# Altium PCB LoRaSnow.PcbDoc
Units mm, origin at the board's own origin, x right, y up, seen from the top; angles counter-clockwise.
Board outline 53.4 x 53.7 mm, 2 copper layers (Top Layer, Bottom Layer), stack 1.57 mm thick; 15 components, 17 nets, 85 pads, 26 vias.
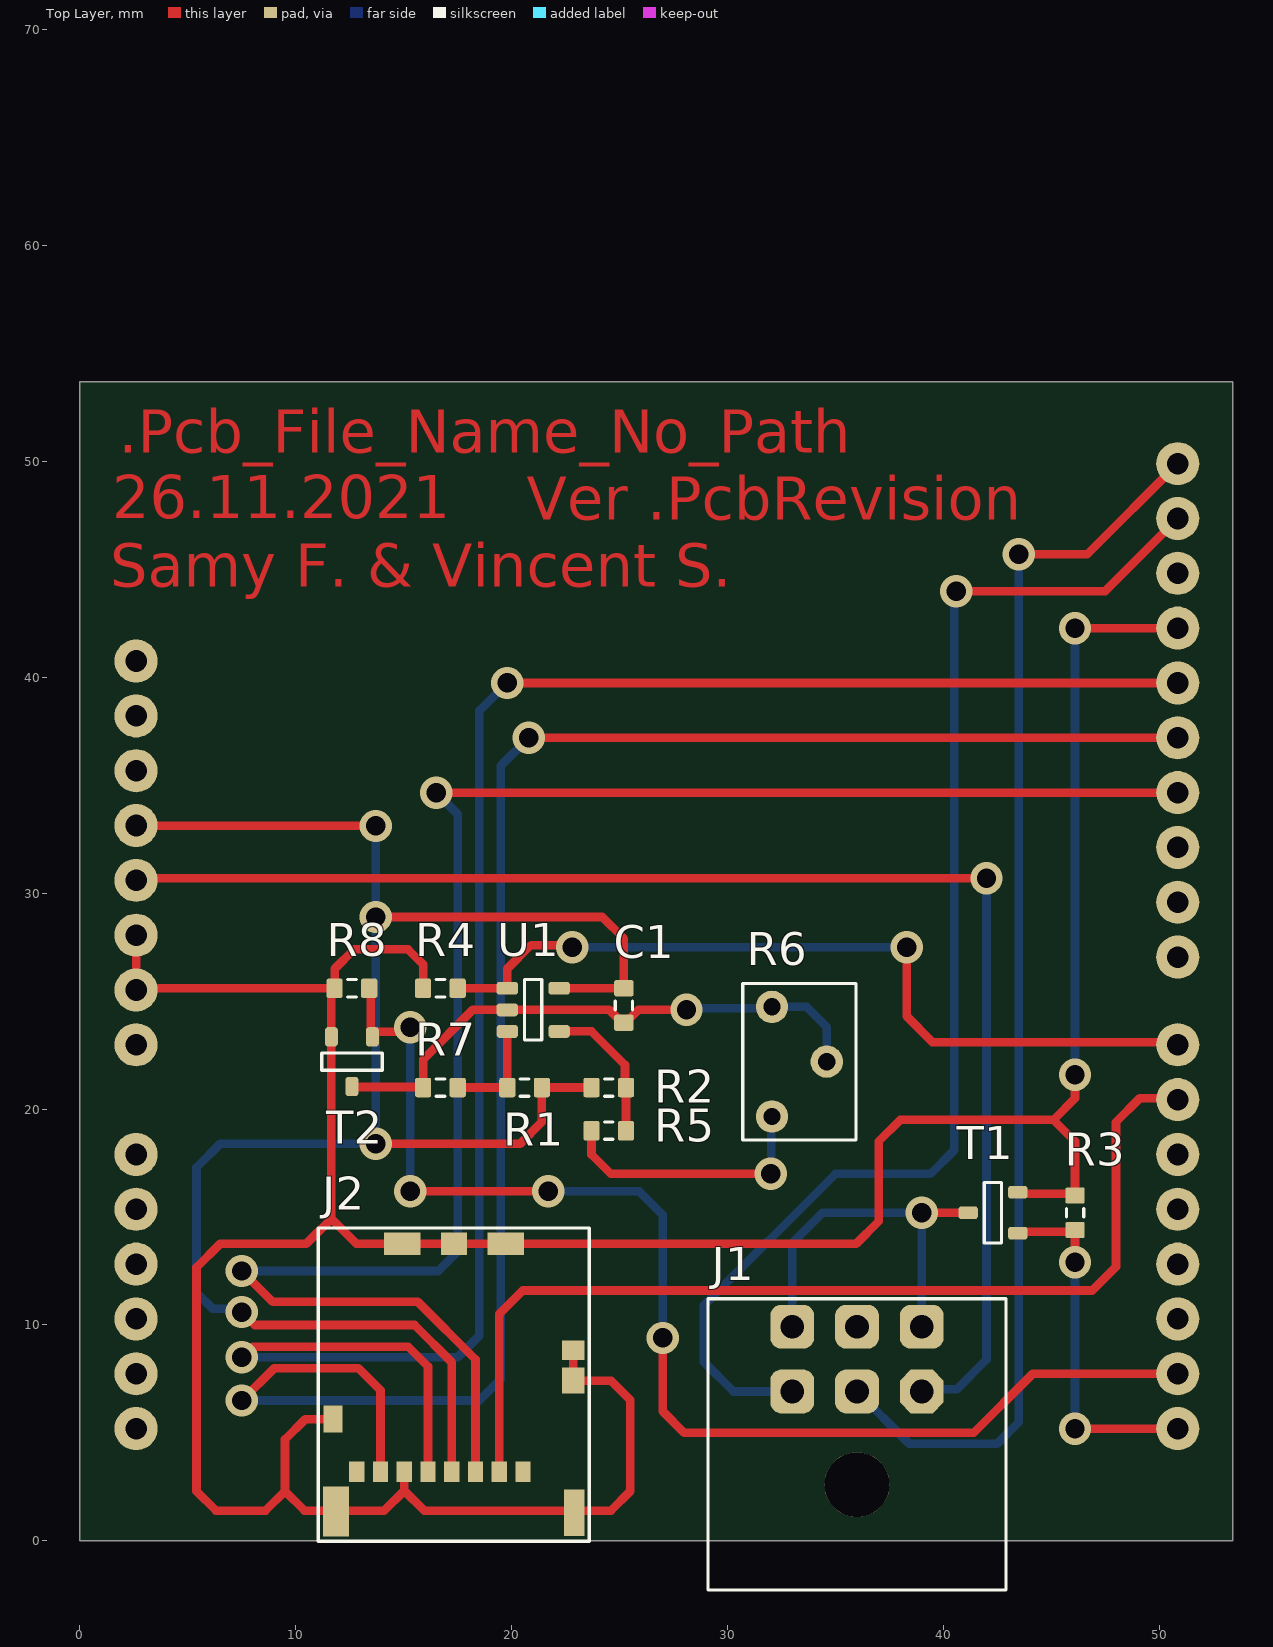
[diagram p0: Top Layer view]
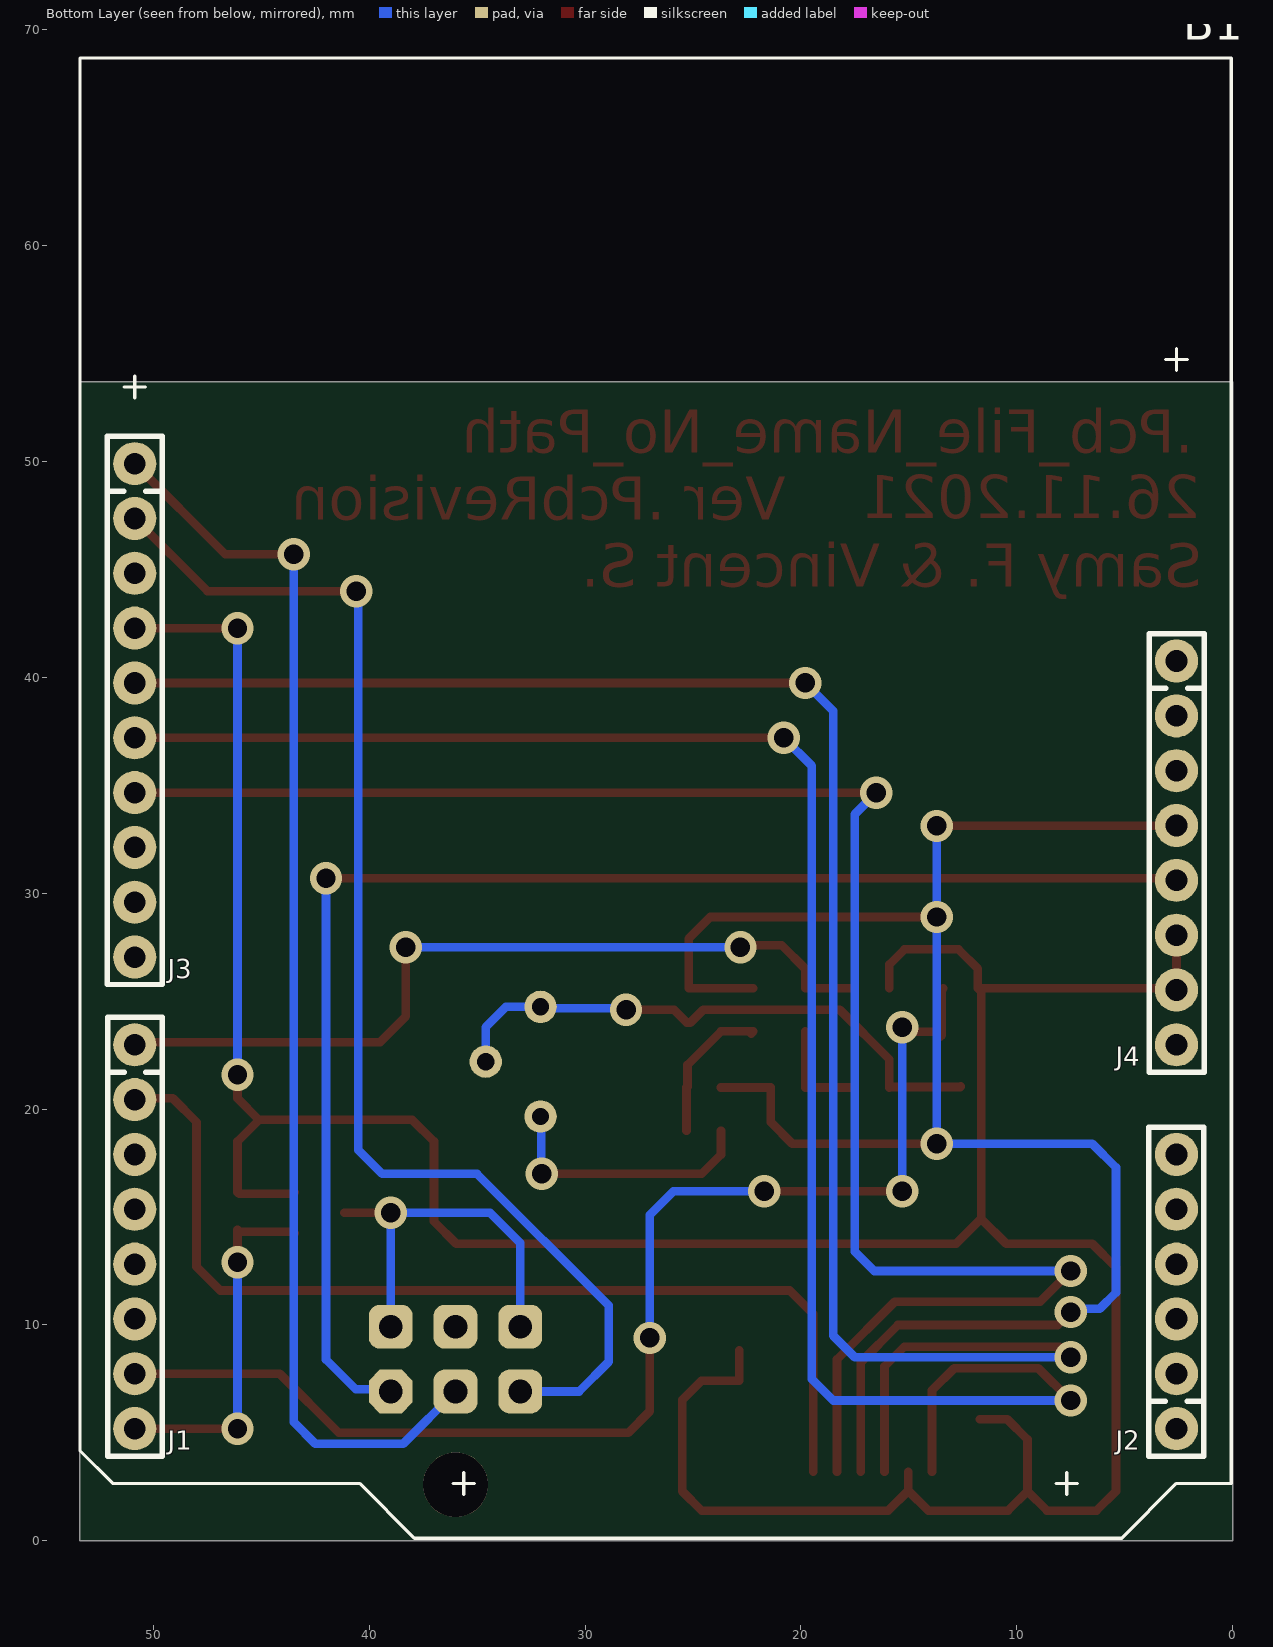
[diagram p1: Bottom Layer view, seen from below]
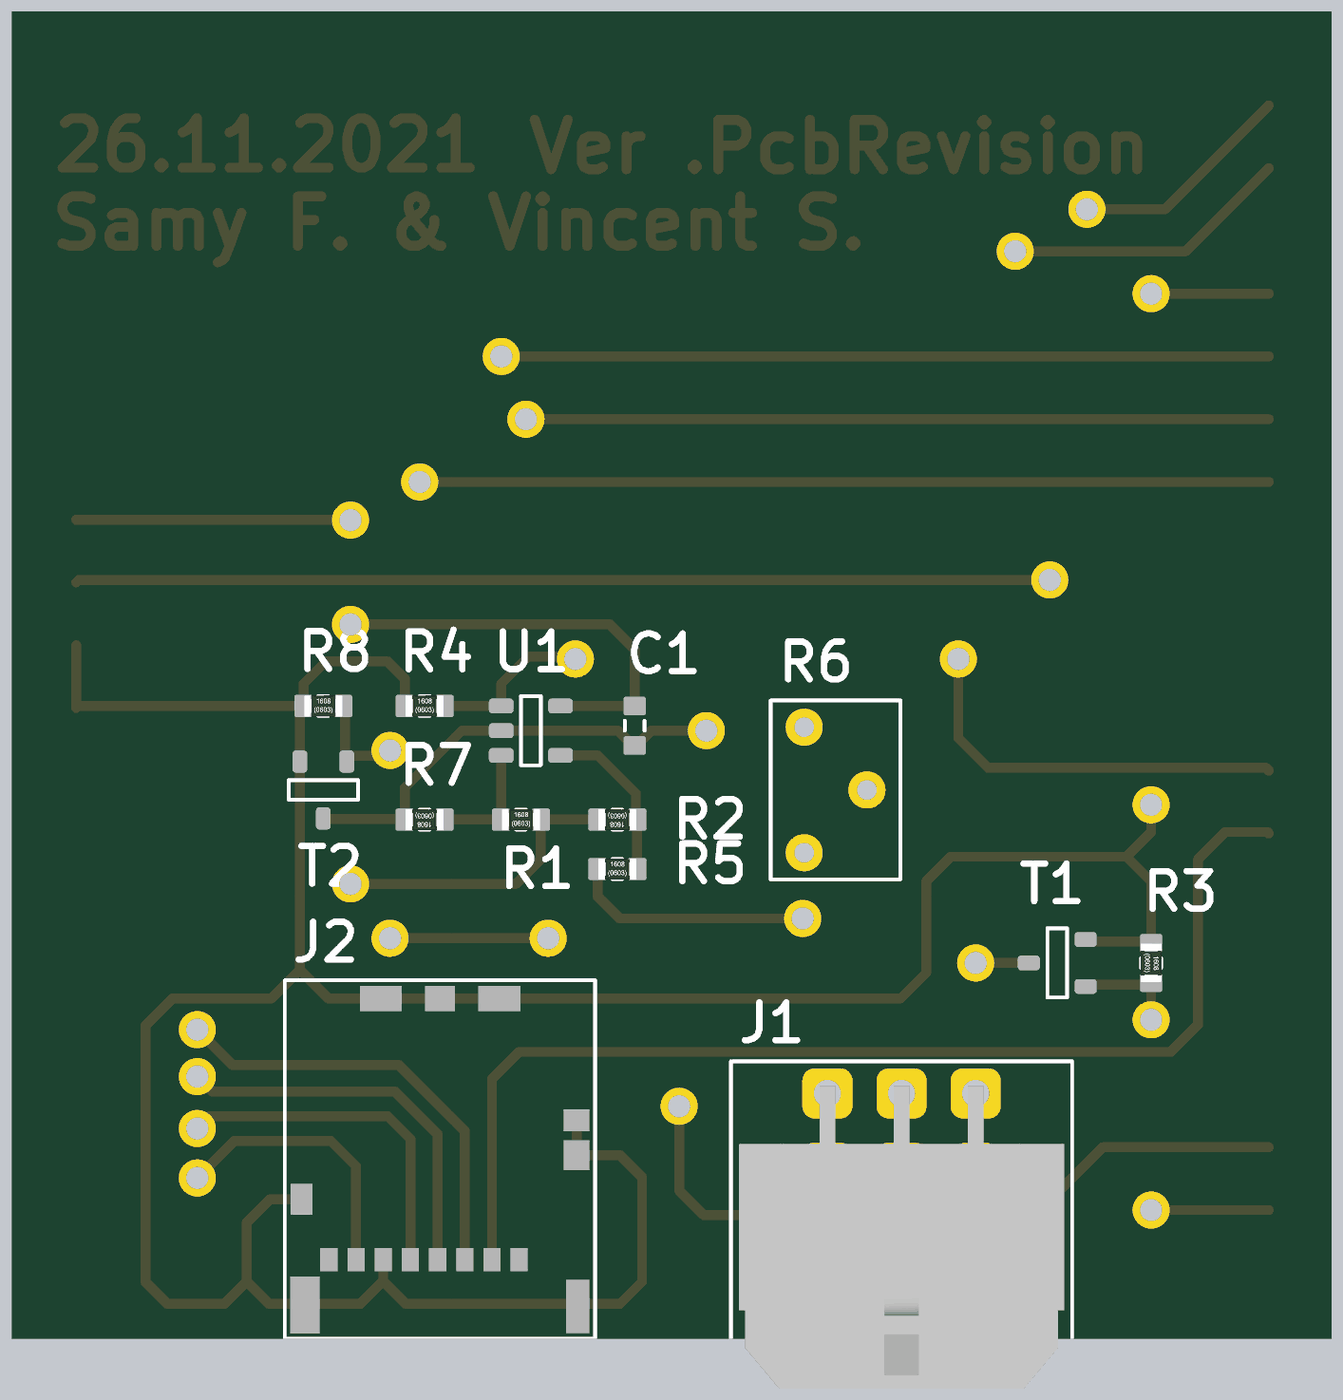
[diagram p2: 3D render of the assembled board from above, using the file's embedded part models]

## Layer stack, top to bottom
Top Layer: signal copper 0.035
Dielectric 1: core 1.5, FR-4, Dk 4.2
Bottom Layer: signal copper 0.035

## Board outline
0,0 53.4,0 53.4,53.7 0,53.7

## Design rules (kind name [scope] priority, off if disabled: settings)
AcuteAngle [All] p1: minimum=9.00000000000000E+0001 checktracksonly=TRUE
AssemblyTestPointUsage [All] p1 off:
AssemblyTestpoint [All] p1 off: testpointundercomponent=TRUE minsize=1.016 maxsize=2.54 preferedsize=1.524 minholesize=0 maxholesize=1.016 preferedholesize=0.813 testpointgrid=0.025 usegrid=TRUE gridtolerance=0 allowsidetop=TRUE allowsidebottom=TRUE
BoardOutlineClearance [All] p1 off: gap=0.25 ignorepadtopadclearanceinfootprint=FALSE
Clearance [All] p1: gap=0.25 ignorepadtopadclearanceinfootprint=FALSE
ComponentClearance [All] p1 off: gap=0.25 collisioncheckmode=3 verticalgap=0.25 showdistances=FALSE
DiffPairsRouting [All] p1 off: maxlimit=0.254 minlimit=0.254 mostfreqgap=0.254 toplayer_minwidth=0.381 toplayer_maxwidth=0.381 toplayer_prefwidth=0.381 bottomlayer_minwidth=0.381 bottomlayer_maxwidth=0.381 bottomlayer_prefwidth=0.381 maxuncoupledlength=12.7
FabricationTestPointUsage [All] p1 off: valid=0 allowmultiple=FALSE
FabricationTestpoint [All] p1 off: side=3 testpointundercomponent=TRUE minsize=1.016 maxsize=2.54 preferedsize=1.524 minholesize=0 maxholesize=1.016 preferedholesize=0.813 testpointgrid=0.025 allowsidetop=TRUE allowsidebottom=TRUE usegrid=TRUE gridtolerance=0
FanoutControl Fanout_BGA [IsBGA] p1 off: bgadir=Out bgaviamode=Centered fanoutstyle=Auto fanoutdirection=Alternating viagrid=0.025 // Fanout_BGA (Default Rule)
FanoutControl Fanout_LCC [IsLCC] p2 off: bgadir=Out bgaviamode=Centered fanoutstyle=Auto fanoutdirection=Alternating viagrid=0.025 // Fanout_LCC (Default Rule)
FanoutControl Fanout_SOIC [IsSOIC] p3 off: bgadir=Out bgaviamode=Centered fanoutstyle=Auto fanoutdirection=Alternating viagrid=0.025 // Fanout_SOIC (Default Rule)
FanoutControl Fanout_Small [(CompPinCount < 5)] p4 off: bgadir=Out bgaviamode=Centered fanoutstyle=Auto fanoutdirection=OutThenIn viagrid=0.025 // Fanout_Small (Default Rule)
FanoutControl Fanout_Default [All] p5 off: bgadir=Out bgaviamode=Centered fanoutstyle=Auto fanoutdirection=Alternating viagrid=0.025 // Fanout_Default (Default Rule)
Height [All] p1 off: minheight=0 maxheight=25.4 prefheight=12.7
HoleSize [All] p1 off: absolutevalues=TRUE maxlimit=3 minlimit=0.15 maxpercent=80.000 minpercent=20.000
HoleToHoleClearance [All] p1 off: gap=0.25 allowstackedmicrovias=TRUE
LayerPairs [All] p1 off: enforce=TRUE
MinimumAnnularRing [All] p1 off: minimumring=0.35
MinimumSolderMaskSliver [All] p1 off: minsoldermaskwidth=0
PasteMaskExpansion [All] p1 off: expansion=0
PlaneClearance [All] p1: clearance=0.25
PlaneConnect [All] p1 off: planeconnectstyle=Relief reliefexpansion=0.5 reliefentries=4 reliefconductorwidth=0.25 reliefairgap=0.25
PolygonConnect [All] p1 off: connectstyle=Relief reliefconductorwidth=0.25 reliefentries=4 polygonreliefangle="90 Angle" airgapwidth=0.25
RoutingCorners [All] p1 off: cornerstyle=45-Degree minsetback=2.5 maxsetback=2.5
RoutingLayers [All] p1 off: top layer_v5=TRUE bottom layer_v5=TRUE
RoutingPriority [All] p1 off: routingpriority=0
RoutingTopology [All] p1 off: topology=Shortest
RoutingVias [All] p1: holewidth=0.9 width=1.5 viastyle="Through Hole" minholewidth=0.9 minwidth=1.5 maxholewidth=0.9 maxwidth=1.5
SilkToBoardRegionClearance [All] p1 off:
SilkToSilkClearance [All] p1 off: silktosilkclearance=0
SilkToSolderMaskClearance [IsPad] p1 off: minsilkscreentomaskgap=0 clearancetoexposedcopper=TRUE
SolderMaskExpansion [All] p1 off: expansion=0
Width [All] p1: maxlimit=4 minlimit=0.25 preferedwidth=0.4 minimp=50.000000 maximp=50.000000 favimp=50.000000
4 further rules are at their usual default settings.

## Components (designator, comment, footprint, x,y, rotation, side; value= is the part's Value field where it differs from the comment)
B1 "Arduino UNO Socket Rev3" "Arduino Uno Socket Rev3" 53.4,68.7 r270 bottom
C1 "100nF" "CAPACITOR 1608 REFLOW" 25.2,24.8 r90 top
J1 "LiDAR Conn - Molex6" "MOLEX 43045-0600" 36,8.42 r0 top
J2 "SD-MICRO MOLEX 504077" "SD MICRO MOLEX 504077" 20.525,3.197 r180 top
R1 "240k" "RESISTOR 1608 REFLOW" 20.6,21 r0 top
R2 "100k" "RESISTOR 1608 REFLOW" 24.5,21 r180 top
R3 "10k" "RESISTOR 1608 REFLOW" 46.1,15.2 r270 top
R4 "100k" "RESISTOR 1608 REFLOW" 16.7,25.6 r0 top
R5 "470k" "RESISTOR 1608 REFLOW" 24.5,19 r0 top
R6 "20k" "Trimmer BOURNS 3266W" 33.33,22.2 r270 top
R7 "480k@25°C" "RESISTOR 1608 REFLOW" 16.7,21 r180 top
R8 "10k" "RESISTOR 1608 REFLOW" 12.6,25.6 r0 top
T1 "PMW13XNEAR" "SOT23 P0.95 C1.6x3.0 H1.3" 42.3,15.2 r180 top
T2 "PMW13XNEAR" "SOT23 P0.95 C1.6x3.0 H1.3" 12.6,22.2 r270 top
U1 "LMC7211AIM5X" "SOT23-5 P0.95 C1.6x3.0 H1.3" 21,24.6 r0 top

## Footprints (in the part's own frame and the unit in brackets; to place one, negate y for a bottom-side part, rotate by r counter-clockwise, add the part's x,y. Pads: shape width x height; smd on the part's side, far side on the other; paste and mask are expansions set on the pad)
"Arduino Uno Socket Rev3" [mm] "Microcontroller board based on the ATmega328 Rev3"
  round 2 hole 1: P1.1(45.72,2.54) P1.2(48.26,2.54) P1.3(50.8,2.54) P1.4(53.34,2.54) P1.5(55.88,2.54) P1.6(58.42,2.54) P1.7(60.96,2.54) P1.8(63.5,2.54) P2.1(63.5,50.8) P2.2(60.96,50.8) P2.3(58.42,50.8) P2.4(55.88,50.8) P2.5(53.34,50.8) P2.6(50.8,50.8) P3.1(18.796,2.54) P3.2(21.336,2.54) P3.3(23.876,2.54) P3.4(26.416,2.54) P3.5(28.956,2.54) P3.6(31.496,2.54) P3.7(34.036,2.54) P3.8(36.576,2.54) P3.9(39.116,2.54) P3.10(41.656,2.54) P4.1(27.94,50.8) P4.2(30.48,50.8) P4.3(33.02,50.8) P4.4(35.56,50.8) P4.5(38.1,50.8) P4.6(40.64,50.8) P4.7(43.18,50.8) P4.8(45.72,50.8)
  silkscreen extent 0,0 68.58,53.34, body extent 17.53,1.27 64.77,52.07, height 8.5
"CAPACITOR 1608 REFLOW" [mm] "Capacitor SMD 1.6x0.8mm (0603-imperial)"
  rrect25% 0.75x0.9 smd: 1(-0.8,0) 2(0.8,0)
  silkscreen extent -0.2,-0.4 0.2,0.4, body extent -0.8,-0.4 0.8,0.4, height 0.8
"MOLEX 43045-0600" [mm] "Micro-Fit 3.06 Right Angle Header, 3.00mm Pitch, Dual Row, 6 Circuits"
  round 3 hole 3 paste-25.4 mask-25.4: 0(0,-5.82)
  oct 2.032x2.032 hole 1.1: 1(3,-1.5)
  rrect50% 2.032x2.032 hole 1.1: 2(0,-1.5) 3(-3,-1.5) 4(3,1.5) 5(0,1.5) 6(-3,1.5)
  silkscreen extent -6.9,-10.7 6.9,2.8, body extent -6.57,-10.45 6.57,1.79, height 8.78
"RESISTOR 1608 REFLOW" [mm] "Resistor SMD 1.6x0.8mm (0603-imperial)"
  rrect25% 0.75x0.9 smd: 1(-0.8,0) 2(0.8,0)
  silkscreen extent -0.2,-0.4 0.2,0.4, body extent -0.77,-0.42 0.78,0.43, height 0.45
"SD MICRO MOLEX 504077" [mm] "SD MICRO MOLEX 504077"
  rect 0.7x0.95 smd: 1(0,0) 2(1.1,0) 3(2.2,0) 4(3.3,0) 5(4.4,0) 6(5.5,0) 7(6.6,0) 8(7.7,0)
  rect 1.05x1.2 smd: 9(-2.325,-4.225)
  rect 1.05x0.9 smd: 10(-2.325,-5.635)
  rect 1.7x1.03 smd: 11(0.8,-10.565) 13(5.6,-10.565)
  rect 1.2x1.03 smd: 12(3.2,-10.565)
  rect 0.88x1.25 smd: 14(8.812,-2.44)
  rect 1.19x2.3 smd: 15(8.662,1.835)
  rect 0.95x2.17 smd: 16(-2.375,1.897)
  Top Layer pour cut-out: -2.512,-2.578 -1.562,-2.578 -1.562,0.41 -2.512,0.41
  Top Layer pour cut-out: -2.2,-9.902 3.213,-9.902 3.213,-7.902 8.375,-7.902 8.375,-3.327 -0.663,-3.327 -0.663,-7.878 -2.2,-7.878
  silkscreen extent -3.08,-11.3 9.49,3.21, body extent -2.5,-10.5 8.8,4.87, height 1.3
"SOT23 P0.95 C1.6x3.0 H1.3" [mm] "SOT23, 3-Leads, Body 1.6x3.0mm, Pitch 0.95mm, IPC Medium Density"
  rrect50% 0.9x0.6 smd: 1(-1.15,0.95) 2(-1.15,-0.95) 3(1.15,0)
  silkscreen extent -0.4,-1.4 0.4,1.4, body extent -0.8,-1.5 0.8,1.5, height 1.3
"SOT23-5 P0.95 C1.6x3.0 H1.3" [mm] "SOT23, 5-Leads, Body 1.6x3.0mm, Pitch 0.95mm, IPC Medium Density"
  rrect50% 1x0.6 smd: 1(-1.2,1) 2(-1.2,0) 3(-1.2,-1) 4(1.2,-1) 5(1.2,1)
  silkscreen extent -0.4,-1.4 0.4,1.4, body extent -0.8,-1.5 0.8,1.5, height 1.3
"Trimmer BOURNS 3266W" [mm] "Trimmer Bourns 3266W P2.54 C7x5"
  round 1.5 hole 0.8: 1(-2.54,-1.27) 2(0,1.27) 3(2.54,-1.27)
  silkscreen extent -3.62,-2.63 3.62,2.63, body extent -3.5,-2.5 3.5,2.5, height 8.5

## Part data
B1: "Microcontroller board based on the ATmega328P Rev3"
C1: library part Capacitor, "Capacitor"
J1: library part "MOLEX 43045-0600", "Micro-Fit 3.0 Right-Angle Header, 3.00mm Pitch, Dual Row, 6 Circuits"
J2: "SD Card Micro"
R1 R2 R3 R4 R5 R8: library part Resistor, "Resistor"
R6: library part Trimmer, "Trimmer", CW=CW
R7: library part "Thermal Resistor", "Thermal Resistor"
T1 T2: library part "MOS-N SOT23 G-S-D", "Generic MOS-N"
U1: library part "COMPARATOR SINGLE SOT23-5", "Generic Single Comparator 5pins 1OUT/2-V/3+IN/4-IN/5+V"

## Via types
v1: diameter 1.5, hole 0.9, Top Layer to Bottom Layer, 26 vias

## Nets (pads, with @x,y where several pads share a name; then routed paths per layer and width w, separated by ;. In a path a pad name is that pad's centre, name@x,y a point inside that pad or via, vN(x,y) a via of type N, cw(c..) or ccw(c..) an arc to the next point about the centre after c; other vN are vias at no path point)
3V3: B1.P4.4 C1.2 J2.4 R1.2 R2.2 U1.5 | length 87.9
  Top Layer w0.4: B1.P4.4 2.61,33.13 13.69,33.13 v1(13.7,33.12) ; v1(7.5,10.6) 8.1,10 15.5,10 17.225,8.275 J2.4 ; v1(13.7,18.4) 20.4,18.4 21.4,19.4 R1.2 R2.2 ; v1(13.7,28.9) 24.2,28.9 25.2,27.9 C1.2 U1.5
  Bottom Layer w0.4: B1.P4.4 B1.P4.4@2.62,33.12 ; v1(7.5,10.6) 7.35,10.75 6.15,10.75 5.4,11.5 5.4,17.3 6.5,18.4 v1(13.7,18.4) v1(13.7,28.9) v1(13.7,33.12)
+5: B1.P4.5 J1.1 | length 65.4
  Top Layer w0.4: B1.P4.5 2.7,30.7 v1(42,30.7)
  Bottom Layer w0.4: B1.P4.5 B1.P4.5@2.65,30.65 ; J1.1 39.096,7.016 40.616,7.016 42,8.4 v1(42,30.7)
GND: B1.P3.4 B1.P4.6 B1.P4.7 J2.6 J2.9 J2.10 J2.11 J2.12 J2.13 J2.14 J2.15 J2.16 R3.1 R4.1 R8.1 T1.2 T2.2 | length 156.8
  Top Layer w0.4: B1.P4.6 B1.P4.7 2.68,25.6 R8.1 ; J2.14 10.437,5.637 9.5,4.7 9.5,2.3 ; J2.6 15.025,2.325 ; R4.1 15.9,26.7 15.2,27.4 12.7,27.4 11.8,26.5 R8.1 ; J2.10 J2.9 24.602,7.422 25.5,6.525 25.5,2.3 24.6,1.4 15.95,1.4 15.025,2.325 ; T1.2 43.525,16.075 46.025,16.075 46.1,16.15 46.1,18.5 45.1,19.5 ; v1(46.1,21.6) 46.1,20.5 45.1,19.5 ; v1(46.1,42.284) B1.P3.4 ; 9.5,2.3 8.6,1.4 6.3,1.4 5.4,2.3 5.4,12.662 6.5,13.762 10.488,13.762 11.65,14.925 ; 9.5,2.3 10.4,1.4 14.1,1.4 15.025,2.325 ; 11.65,14.925 T2.2 11.65,25.45 R8.1 ; 11.65,14.925 12.813,13.762 J2.13 J2.12 J2.11 35.962,13.762 37,14.8 37,18.5 38,19.5 45.1,19.5
  Bottom Layer w0.4: B1.P4.7 B1.P4.7@2.64,25.56 ; v1(46.1,21.6) v1(46.1,42.284) ; B1.P3.4@50.776,42.2 B1.P3.4
NetB1_P1.1: B1.P1.1 R4.2 U1.1 | length 38.5
  Top Layer w0.4: R4.2 U1.1 19.8,26.5 20.9,27.6 22.7,27.6 v1(22.8,27.5) ; v1(38.3,27.5) 38.3,24.3 39.5,23.1 50.74,23.1 B1.P1.1
  Bottom Layer w0.4: v1(22.8,27.5) v1(38.3,27.5)
NetB1_P1.2: B1.P1.2 J2.2 | length 46.9
  Top Layer w0.4: J2.2 19.425,10.506 20.519,11.6 46.9,11.6 48,12.7 48,19.4 49.1,20.5 50.8,20.5 B1.P1.2
  Bottom Layer w0.4: B1.P1.2@50.8,20.5 B1.P1.2
NetB1_P1.7: B1.P1.7 R8.2 T2.1 | length 58.6
  Top Layer w0.4: R8.2 13.475,25.525 13.475,23.425 T2.1 13.55,23.49 13.65,23.59 15.09,23.59 v1(15.3,23.8) ; v1(15.3,16.2) v1(21.7,16.2) ; v1(27,9.4) 27,6 28,5 41.4,5 44.14,7.74 B1.P1.7
  Bottom Layer w0.4: v1(15.3,16.2) v1(15.3,23.8) ; v1(21.7,16.2) 25.9,16.2 27,15.1 v1(27,9.4)
NetB1_P1.8: B1.P1.8 R3.2 T1.1 | length 16.8
  Top Layer w0.4: T1.1 43.525,14.325 46.025,14.325 R3.2 v1(46.1,12.9) ; v1(46.1,5.2) B1.P1.8
  Bottom Layer w0.4: v1(46.1,5.2) v1(46.1,12.9) ; B1.P1.8@50.76,5.3 B1.P1.8
NetB1_P3.1: B1.P3.1 J1.2 | length 58.2
  Top Layer w0.4: v1(43.5,45.7) 46.656,45.7 B1.P3.1
  Bottom Layer w0.4: J1.2 38.42,4.5 42.5,4.5 43.5,5.5 v1(43.5,45.7)
NetB1_P3.2: B1.P3.2 J1.3 | length 59.4
  Top Layer w0.4: v1(40.6,44) 47.496,44 B1.P3.2
  Bottom Layer w0.4: J1.3 30.28,6.92 28.9,8.3 28.9,10.9 35,17 39.4,17 40.5,18.1 40.5,43.9 v1(40.6,44)
NetB1_P3.5: B1.P3.5 J2.5 | length 87.3
  Top Layer w0.4: v1(7.5,8.5) 8,9 15.2,9 16.125,8.075 J2.5 ; v1(19.8,39.744) B1.P3.5
  Bottom Layer w0.4: v1(7.5,8.5) 17.5,8.5 18.5,9.5 18.5,38.444 v1(19.8,39.744)
NetB1_P3.6: B1.P3.6 J2.7 | length 84
  Top Layer w0.4: v1(7.5,6.5) 9,8 12.9,8 13.925,6.975 J2.7 ; v1(20.8,37.204) B1.P3.6
  Bottom Layer w0.4: v1(7.5,6.5) 18.5,6.5 19.5,7.5 19.5,35.904 v1(20.8,37.204)
NetB1_P3.7: B1.P3.7 J2.3 | length 84.2
  Top Layer w0.4: v1(7.5,12.5) 8.925,11.075 15.65,11.075 18.325,8.4 J2.3 ; v1(16.5,34.664) B1.P3.7
  Bottom Layer w0.4: v1(7.5,12.5) 16.6,12.5 17.5,13.4 17.5,33.664 v1(16.5,34.664) ; B1.P3.7@50.842,34.682 B1.P3.7
NetC1_1: C1.1 R6.1 R6.2 R7.2 T2.3 U1.2 | length 26.8
  Top Layer w0.4: T2.3 12.625,21.025 15.875,21.025 R7.2 15.9,22.3 18.2,24.6 U1.2 24.525,24.6 25.125,24 C1.1 25.275,24 25.875,24.6 v1(28.1,24.6)
  Bottom Layer w0.4: v1(28.1,24.6) 28.17,24.67 31.99,24.67 R6.1 33.66,24.74 34.6,23.8 R6.2
NetJ1_4: J1.4 J1.6 T1.3 | length 17.9
  Top Layer w0.4: v1(39,15.2) T1.3
  Bottom Layer w0.4: J1.6 33,13.8 34.4,15.2 v1(39,15.2) J1.4
NetR1_1: R1.1 R7.1 U1.3 | length 4.9
  Top Layer w0.4: R7.1 R1.1 U1.3
NetR2_1: R2.1 R5.2 U1.4 | length 6.9
  Top Layer w0.4: U1.4@22.3,23.5 U1.4 23.7,23.6 25.25,22.05 25.25,21.05 R2.1 R5.2
NetR5_1: R5.1 R6.3 | length 12.5
  Top Layer w0.4: R5.1 23.7,17.9 24.6,17 v1(32,17)
  Bottom Layer w0.4: v1(32,17) 32.03,17.03 32.03,19.63 R6.3
pads on no net: B1.P1.3 B1.P1.4 B1.P1.5 B1.P1.6 B1.P2.1 B1.P2.2 B1.P2.3 B1.P2.4 B1.P2.5 B1.P2.6 B1.P3.3 B1.P3.8 B1.P3.9 B1.P3.10 B1.P4.1 B1.P4.2 B1.P4.3 B1.P4.8 J1.0 J1.5 J2.1 J2.8

## Other copper
Top Layer:
  text ".Pcb_File_Name_No_Path" at 1.8,50.4 h2
  text "26.11.2021" at 1.5,47.364 h2
  text "Ver .PcbRevision" at 20.7,47.3 h2
  text "Samy F. & Vincent S." at 1.4,44.2 h2

## Silkscreen, mask and mechanical layers (free items; w line width, h text height)
Mechanical 1:
  the board outline again, w0.15

## Text inside footprints (layer, text, board x,y; h text height)
B1: Bottom Overlay "J4" at 5.404,21.71 h1.5; Bottom Overlay "J2" at 5.404,3.93 h1.5; Bottom Overlay "J3" at 49.336,25.774 h1.5; Bottom Overlay "J1" at 49.336,3.93 h1.5